# Altium PCB PCB.PcbDoc
Units mm, origin at the board's own origin, x right, y up, seen from the top; angles counter-clockwise.
Board outline 70 x 40 mm, 2 copper layers (Top Layer, Bottom Layer); 68 components, 61 nets, 203 pads, 52 vias.
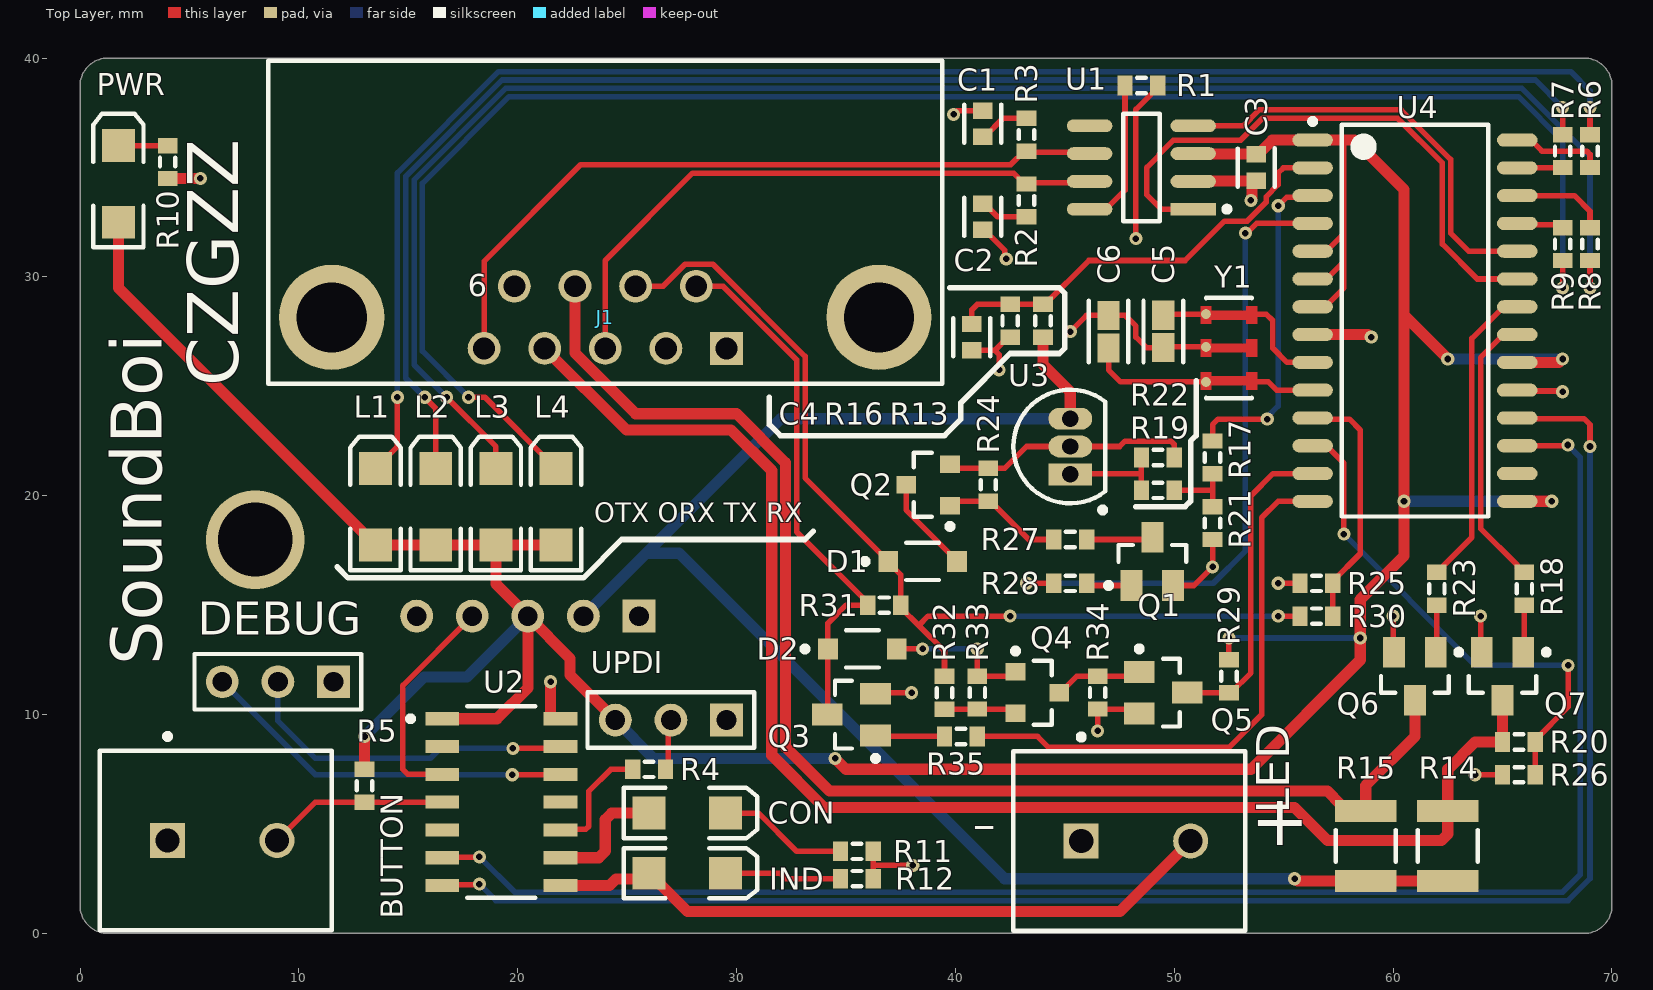
[diagram p0: Top Layer view]
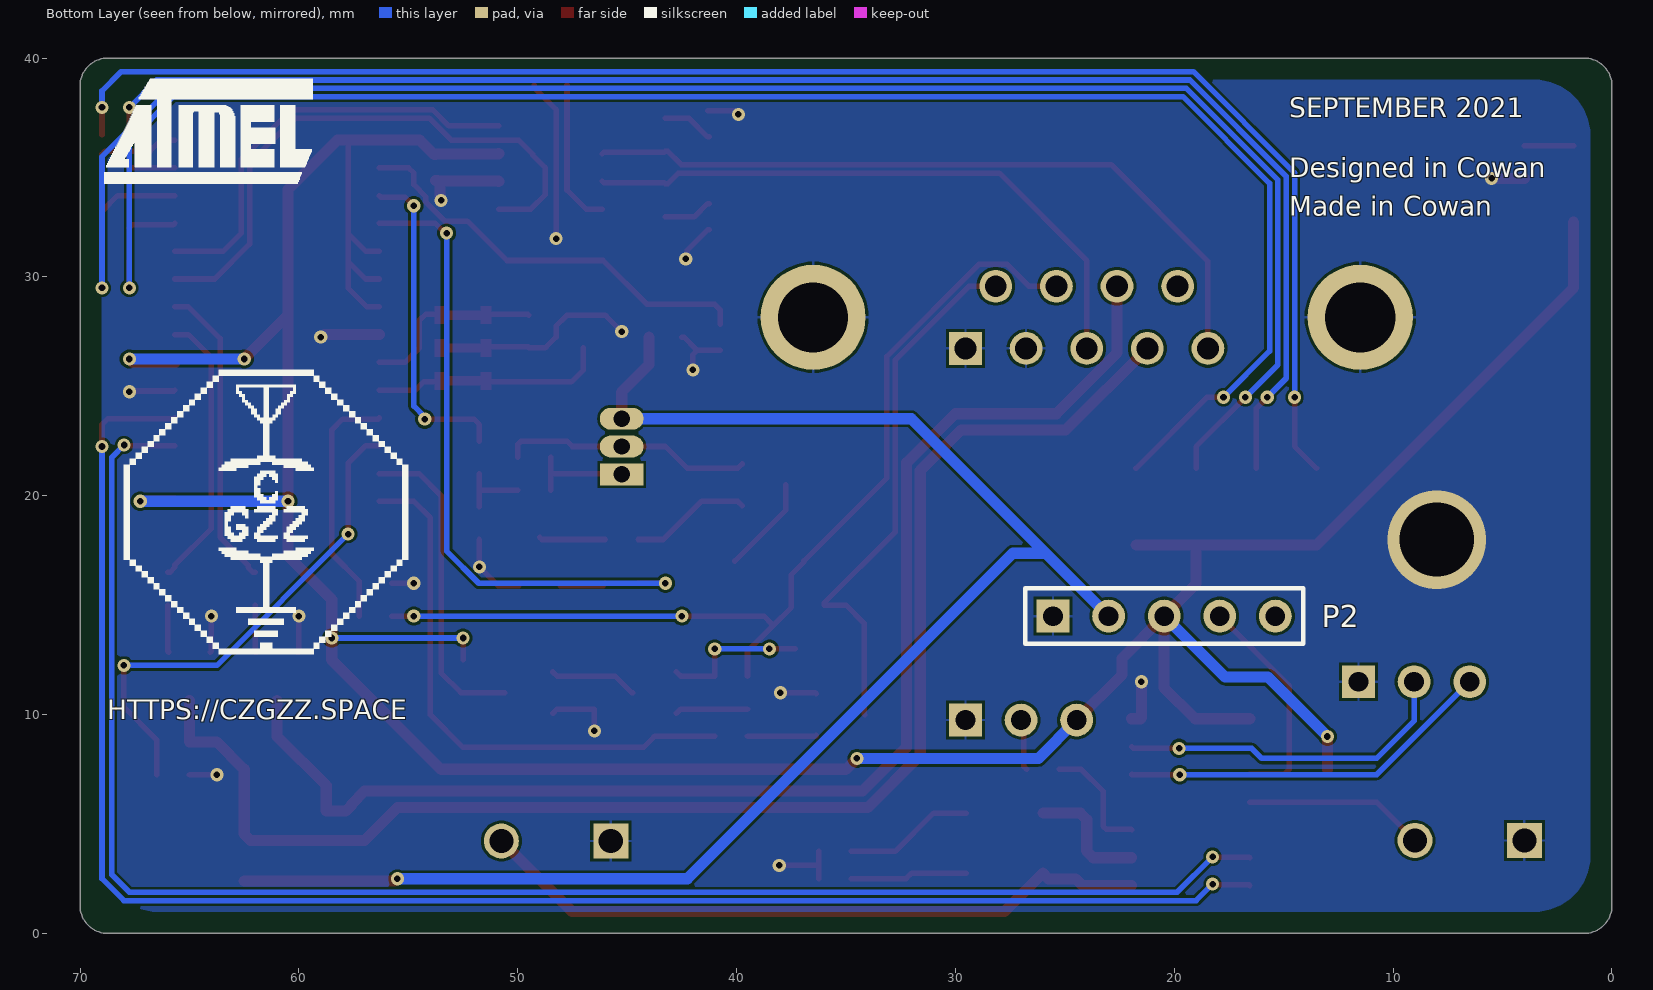
[diagram p1: Bottom Layer view, seen from below]

## Layer stack, top to bottom
Top Solder: solder mask 0.0102, Solder Resist, Dk 3.5
Top Layer: signal copper 0.0356
Dielectric 1: dielectric 0.32, FR-4, Dk 4.8
Bottom Layer: signal copper 0.0356
Bottom Solder: solder mask 0.0102, Solder Resist, Dk 3.5

## Board outline
1.27,0 cw(c1.27,1.27) 0,1.27 0,38.73 cw(c1.27,38.73) 1.27,40 68.73,40 cw(c68.73,38.73) 70,38.73 70,1.27 cw(c68.73,1.27) 68.73,0

## Design rules (kind name [scope] priority, off if disabled: settings)
BoardOutlineClearance [All] p1: gap=0.2 ignorepadtopadclearanceinfootprint=FALSE
Clearance [All] p1: gap=0.127 ignorepadtopadclearanceinfootprint=FALSE except(0.25: Arc-Hole Track-Hole SMDPad-Hole THPad-Hole Via-Hole Fill-Hole Poly-Hole Region-Hole Text-Hole)
ComponentClearance [All] p1: gap=0.127 collisioncheckmode=3 verticalgap=0.127 showdistances=TRUE
DiffPairsRouting [All] p1: maxlimit=0.254 minlimit=0.127 mostfreqgap=0.127 toplayer_minwidth=0.127 toplayer_maxwidth=25.4 toplayer_prefwidth=0.127 bottomlayer_minwidth=0.127 bottomlayer_maxwidth=25.4 bottomlayer_prefwidth=0.127 maxuncoupledlength=12.7
Height [All] p1: minheight=0 maxheight=1816.048 prefheight=12.7
HoleSize [All] p1: absolutevalues=TRUE maxlimit=6.3 minlimit=0.3 maxpercent=80.000 minpercent=20.000
HoleToHoleClearance [All] p1: gap=0.25 allowstackedmicrovias=FALSE
MinimumAnnularRing [All] p1: minimumring=0.076
MinimumSolderMaskSliver [All] p1: minsoldermaskwidth=0
PlaneClearance [All] p1: clearance=0.127
PlaneConnect PlaneConnectPowerPads [InPadClass('PowerPads')] p1: planeconnectstyle=Direct reliefexpansion=0.508 reliefentries=4 reliefconductorwidth=0.254 reliefairgap=0.254
PlaneConnect [All] p2: pad.planeconnectstyle=Relief pad.reliefexpansion=0.3 pad.reliefentries=4 pad.reliefconductorwidth=0.127 pad.reliefairgap=0.127 via.planeconnectstyle=Direct via.reliefexpansion=0.3 via.reliefentries=4 via.reliefconductorwidth=0.127 via.reliefairgap=0.127
PolygonConnect PolygonConnectPowerPads [All vs (InPadClass('PowerPads'))] p1: connectstyle=Direct reliefconductorwidth=0.254 reliefentries=4 polygonreliefangle="90 Angle" airgapwidth=0.254
PolygonConnect [All] p2: thpad.connectstyle=Relief thpad.reliefconductorwidth=0.127 thpad.reliefentries=4 thpad.polygonreliefangle="90 Angle" thpad.airgapwidth=0.127 smdpad.connectstyle=Relief smdpad.reliefconductorwidth=0.127 smdpad.reliefentries=4 smdpad.polygonreliefangle="90 Angle" smdpad.airgapwidth=0.127 via.connectstyle=Direct via.reliefconductorwidth=0.127 via.reliefentries=4 via.polygonreliefangle="90 Angle" via.airgapwidth=0.127
RoutingVias [All] p1: holewidth=0.3 width=0.6 viastyle="Through Hole" minholewidth=0.3 minwidth=0.6 maxholewidth=0.6 maxwidth=6.6
SilkToSilkClearance [All] p1: silktosilkclearance=0
SilkToSolderMaskClearance [IsPad] p1: minsilkscreentomaskgap=0.127 clearancetoexposedcopper=TRUE
SolderMaskExpansion [All] p1: expansion=0.075 istentingtop=FALSE
Width [All] p1: maxlimit=25.4 minlimit=0.127 preferedwidth=0.127 minimp=50.000000 maximp=50.000000 favimp=50.000000
20 further rules are at their usual default settings.

## Components (designator, comment, footprint, x,y, rotation, side; value= is the part's Value field where it differs from the comment)
BUTTON "282836-2" TECO-282836-2_V 6.5,4.25 r0 top
C1 "C0603C561K5RACTU" FP-C0603C-CF-MFG 41.25,37 r90 top value="560 pF"
C2 "C0603C561K5RACTU" FP-C0603C-CF-MFG 41.25,32.75 r270 top value="560 pF"
C3 "C0603C104K5RACTU" FP-C0603C-CF-MFG 53.75,35 r270 top value="0.10 μF"
C4 "C0603C104K5RACTU" FP-C0603C-CF-MFG 40.75,27.25 r270 top value="0.10 μF"
C5 "C1608NP01H270J080AA" FP-C1608-080-0_1-IPC_A 49.5,27.509 r270 top
C6 "C1608NP01H270J080AA" FP-C1608-080-0_1-IPC_A 47,27.5 r90 top
CON "LED2" 3.2X1.6X1.1 27.75,5.5 r0 top
D1 "1N4148W-13-F" FP-SOD123-MFG 38.5,17 r0 top value=2pF
D2 "1N4148W-13-F" FP-SOD123-MFG 35.75,13 r0 top value=2pF
DEBUG "Header 3" HDR1X3 11.58,11.5 r180 top
IND "LED2" 3.2X1.6X1.1 27.75,2.75 r0 top
J1 "618009231421" 618009231421 24,32.5 r180 top
L1 "LED2" 3.2X1.6X1.1 13.5,19.5 r90 top
L2 "LED2" 3.2X1.6X1.1 16.25,19.5 r90 top
L3 "LED2" 3.2X1.6X1.1 19,19.5 r90 top
L4 "LED2" 3.2X1.6X1.1 21.75,19.5 r90 top
LED "282836-2" TECO-282836-2_V 48.25,4.225 r0 top
P2 "Header 5" HDR1X5 25.54,14.5 r180 bottom locked
PWR "LED2" 3.2X1.6X1.1 1.75,34.25 r90 top
Q1 "MMBT3904" FAIR-SOT23-3_V 49,17 r90 top
Q2 "MMBT3906LT1G" ONSC-SOT-23-3-318-08_V 38.75,20.5 r180 top
Q3 "MMBT3904" FAIR-SOT23-3_V 35.25,10 r180 top
Q4 "MMBT3906LT1G" ONSC-SOT-23-3-318-08_V 43.75,11.004 r0 top
Q5 "MMBT3904" FAIR-SOT23-3_V 49.5,11.004 r0 top
Q6 "MMBT3904" FAIR-SOT23-3_V 61,11.75 r270 top
Q7 "MMBT3904" FAIR-SOT23-3_V 65,11.75 r270 top
R1 "Res3" J1-0603 48.5,38.75 r0 top value=4.7K
R2 "Res3" J1-0603 43.25,33.5 r90 top value=100
R3 "Res3" J1-0603 43.25,36.5 r270 top value=100
R4 "Res3" J1-0603 26,7.5 r180 top value=4.7K
R5 "Res3" J1-0603 13,6.75 r90 top value=10K
R6 "Res3" J1-0603 69,35.75 r90 top value=470
R7 "Res3" J1-0603 67.75,35.75 r90 top value=470
R8 "Res3" J1-0603 69,31.5 r270 top value=470
R9 "Res3" J1-0603 67.75,31.5 r270 top value=470
R10 "Res3" J1-0603 4,35.25 r90 top value=470
R11 "Res3" J1-0603 35.5,3.75 r180 top value=470
R12 "Res3" J1-0603 35.5,2.5 r180 top value=470
R13 "Res3" J1-0603 44,28 r90 top value=47K
R14 "RMCF1210JT510R" FP-RMCF1210-MFG 62.5,4 r270 top
R15 "RMCF1210JT510R" FP-RMCF1210-MFG 58.75,4 r270 top
R16 "Res3" J1-0603 42.5,28 r90 top value=10K
R17 "Res3" J1-0603 51.75,21.75 r90 top value=2.2K
R18 "Res3" J1-0603 62,15.75 r270 top value=2.2K
R19 "Res3" J1-0603 49.25,20.25 r180 top value=470
R20 "Res3" J1-0603 65.75,8.75 r0 top value=47K
R21 "Res3" J1-0603 51.75,18.75 r270 top value=1.8K
R22 "Res3" J1-0603 49.25,21.75 r0 top value=470
R23 "Res3" J1-0603 66,15.75 r270 top value=2.2K
R24 "Res3" J1-0603 41.5,20.5 r90 top value=10K
R25 "Res3" J1-0603 56.5,16 r180 top value=22K
R26 "Res3" J1-0603 65.75,7.25 r180 top value=33K
R27 "Res3" J1-0603 45.25,18 r180 top value=4.7K
R28 "Res3" J1-0603 45.25,16 r0 top value=4.7K
R29 "Res3" J1-0603 52.5,11.754 r270 top value=4.7K
R30 "Res3" J1-0603 56.5,14.5 r0 top value=10K
R31 "Res3" J1-0603 36.75,15 r180 top value=22K
R32 "Res3" J1-0603 39.5,11 r90 top value=10K
R33 "Res3" J1-0603 41,11.004 r90 top value=47K
R34 "Res3" J1-0603 46.5,11.004 r90 top value=10K
R35 "Res3" J1-0603 40.25,9 r180 top value=4.7K
U1 "MCP2551T-I/SN" FP-C04-057-SN-IPC_B 48.5,35 r180 top
U2 "ATTINY1614-SSFR" FP-C04-065-D3X-MFG 19.25,6 r0 top
U3 "LM317LZ" Z03A 45.25,22.25 r0 top
U4 "ELM327" SOIC28 61,28 r0 top
UPDI "Header 3" HDR1X3 29.54,9.75 r180 top
Y1 "CSTCR4M00G53-R0" FP-CSTCR4M00G53-R0-MFG 52.5,26.75 r270 top

## Footprints (in the part's own frame and the unit in brackets; to place one, negate y for a bottom-side part, rotate by r counter-clockwise, add the part's x,y. Pads: shape width x height; smd on the part's side, far side on the other; paste and mask are expansions set on the pad)
3.2X1.6X1.1 [mm] "SMT LED; 2 Flat Leads"
  rect 1.5x1.5 smd: 1(-1.75,0) 2(1.75,0)
  silkscreen extent -2.9,-1.15 3.2,1.15
618009231421 [mm] "9 pins, right angled, 10.3mm, with hex screw"
  rect 1.5x1.5 hole 1: 1(-5.54,5.765)
  round 1.5 hole 1: 2(-2.77,5.765) 3(0,5.765) 4(2.77,5.765) 5(5.54,5.765) 6(-4.155,2.925) 7(-1.385,2.925) 8(1.385,2.925) 9(4.155,2.925)
  round 4.8 hole 3.2: M1(-12.5,4.345) M2(12.5,4.345)
  silkscreen extent -15.4,-7.37 15.4,7.37, body extent -15.4,-13.38 15.4,7.37, height 12.55
FAIR-SOT23-3_V [mm] "SOT23, 3-Leads, Body 3.12x1.5mm, Pitch 0.95mm"
  rect 1.4x1 smd: 1(-1.1,0.95) 2(-1.1,-0.95) 3(1.1,0)
  silkscreen extent -1.22,-1.55 0.75,2.12, body extent -1.35,-1.56 1.35,1.56, height 1.2
FP-C04-057-SN-IPC_B [mm]
  rect 2.077x0.582 smd paste+0 mask+0: 1(-2.368,1.905)
  rrect100% 2.077x0.582 smd paste+0 mask+0: 2(-2.368,0.635) 3(-2.368,-0.635) 4(-2.368,-1.905) 5(2.368,-1.905) 6(2.368,-0.635) 7(2.368,0.635) 8(2.368,1.905)
  silkscreen extent -4.03,-2.45 0.83,2.45, body extent -3.66,-2.7 3.66,2.7, height 0.25
FP-C04-065-D3X-MFG [mm]
  rect 1.55x0.6 smd paste+0 mask+0: 1(-2.7,3.81) 2(-2.7,2.54) 3(-2.7,1.27) 4(-2.7,0) 5(-2.7,-1.27) 6(-2.7,-2.54) 7(-2.7,-3.81) 8(2.7,-3.81) 9(2.7,-2.54) 10(2.7,-1.27) 11(2.7,0) 12(2.7,1.27) 13(2.7,2.54) 14(2.7,3.81)
  silkscreen extent -4.27,-4.38 1.55,4.38, body extent -3.57,-4.62 3.57,4.62, height 0.25
FP-C0603C-CF-MFG [mm]
  rect 0.75x0.9 smd paste+0 mask+0: 1(-0.6,0) 2(0.6,0)
  silkscreen extent -0.87,-0.85 0.88,0.85, body extent -1.2,-0.6 1.2,0.6, height 0.25
FP-C1608-080-0_1-IPC_A [mm]
  rect 1.331x1.012 smd paste+0 mask+0: 1(-0.741,0) 2(0.741,0)
  silkscreen extent -1.41,-0.91 1.41,0.91, body extent -1.91,-1.01 1.91,1.01, height 0.25
FP-CSTCR4M00G53-R0-MFG [mm]
  round 0.45 smd paste+0 mask+0: 1(-1.55,-1.05) 2(-0.05,-1.05) 3(1.55,-1.05)
  Top Layer region: -1.9,1.3 -1.1,1.3 -1.1,0.8 -1.3,0.8 -1.3,-0.8 -1.1,-0.8 -1.1,-1.3 -1.9,-1.3 -1.9,-0.8 -1.7,-0.8 -1.7,0.8 -1.9,0.8 -1.9,1.3
  Top Layer region: -0.4,1.3 0.4,1.3 0.4,0.8 0.2,0.8 0.2,-0.8 0.4,-0.8 0.4,-1.3 -0.4,-1.3 -0.4,-0.8 -0.2,-0.8 -0.2,0.8 -0.4,0.8 -0.4,1.3
  Top Layer region: 1.1,1.3 1.9,1.3 1.9,0.8 1.7,0.8 1.7,-0.8 1.9,-0.8 1.9,-1.3 1.1,-1.3 1.1,-0.8 1.3,-0.8 1.3,0.8 1.1,0.8 1.1,1.3
  silkscreen extent -2.3,-1.05 2.3,1.05, body extent -2.4,-1.4 2.4,1.4, height 0.25
FP-RMCF1210-MFG [mm]
  rect 1x2.8 smd paste+0 mask+0: 1(-1.6,0) 2(1.6,0)
  silkscreen extent -0.72,-1.38 0.72,1.38, body extent -2.2,-1.5 2.2,1.5, height 0.25
FP-SOD123-MFG [mm]
  rect 0.9x0.95 smd paste+0 mask+0: 1(-1.575,0) 2(1.575,0)
  silkscreen extent -2.75,-0.85 0.75,0.85, body extent -2.12,-0.95 2.12,0.95, height 0.25
HDR1X3 [mm] "Connector; Header; 3 Position"
  rect 1.5x1.5 hole 0.9: 1(0,0)
  round 1.5 hole 0.9: 2(2.54,0) 3(5.08,0)
  silkscreen extent -1.27,-1.27 6.35,1.27
HDR1X5 [mm] "Connector; Header; 5 Position"
  rect 1.5x1.5 hole 0.9: 1(0,0)
  round 1.5 hole 0.9: 2(2.54,0) 3(5.08,0) 4(7.62,0) 5(10.16,0)
  silkscreen extent -1.27,-1.27 11.43,1.27
J1-0603 [mm] "Chip Resistor, Body 1.6x0.8mm, IPC High Density"
  rect 0.7x0.9 smd: 1(-0.75,0) 2(0.75,0)
  silkscreen extent -0.2,-0.35 0.2,0.35, body extent -0.85,-0.48 0.85,0.48, height 0.9
ONSC-SOT-23-3-318-08_V [mm] "SOT23, 3-Leads, Body 2.92x1.3mm, Pitch 0.95mm"
  rect 0.9x0.8 smd: 1(-1,0.95) 2(-1,-0.95) 3(1,0)
  silkscreen extent -1.13,-1.46 0.65,2.02, body extent -0.65,-1.46 0.65,1.46, height 1.11
SOIC28 [mm]
  oval 1.85x0.6 smd: 1(-4.675,8.255) 2(-4.675,6.985) 3(-4.675,5.715) 4(-4.675,4.445) 5(-4.675,3.175) 6(-4.675,1.905) 7(-4.675,0.635) 8(-4.675,-0.635) 9(-4.675,-1.905) 10(-4.675,-3.175) 11(-4.675,-4.445) 12(-4.675,-5.715) 13(-4.675,-6.985) 14(-4.675,-8.255) 15(4.675,-8.255) 16(4.675,-6.985) 17(4.675,-5.715) 18(4.675,-4.445) 19(4.675,-3.175) 20(4.675,-1.905) 21(4.675,-0.635) 22(4.675,0.635) 23(4.675,1.905) 24(4.675,3.175) 25(4.675,4.445) 26(4.675,5.715) 27(4.675,6.985) 28(4.675,8.255)
  silkscreen extent -4.8,-8.95 3.35,9.23, body extent -5.15,-8.95 5.15,8.95, height 2.65
TECO-282836-2_V [mm] "Female Header, Pitch 5mm, 1 x 2 Position, Height 10mm"
  rect 1.6x1.6 hole 1.1: 1(-2.5,0)
  round 1.6 hole 1.1: 2(2.5,0)
  silkscreen extent -5.6,-4.1 5,4.87, body extent -5.6,-4.1 5,4.1, height 10
Z03A [mm] "TO, Flat Index; 3 In-Line, Axial Leads; Body Dia. 5mm; Leads 0.55 x 0.50 mm (max)"
  rect 2x1 hole 0.75: 1(0,-1.27)
  oval 2x1 hole 0.75: 2(0,0) 3(0,1.27)
  silkscreen extent -2.6,-3.02 1.61,2.6, body extent -2.6,-2.61 1.6,2.61, height 5.2

## Part data
BUTTON LED: library part CMP-1684-00017-1, "Female Header, Pitch 5 mm, 1 x 2 Position, Height 10 mm, Tail Length 3.5 mm, Rohs, Bulk", Color=Green, Current=13.5A, Manufacturer="TE Connectivity", Package Description="Female Header, Pitch 5 mm, 1 x 2 Position, Height 10 mm, Tail Length 3.5 mm", Package Reference=THD, Standard Package=300, Voltage=300V, 3D Model=282836-2.pdf, Category=Connectors,Interconnects, Clamp Material - Plating=Brass-NickelPlated, Contact Material - Plating=Brass-TinPlated, Datasheet URL=http://www.te.com.cn/commerce/DocumentDelivery/DDEController?Action=showdoc&DocId=Catalog+Section%7F1308389_EUROSTYLE_TERMINAL_BLOCKS%7F0607%7Fpdf%7FEnglish%7FENG_CS_1308389_EUROSTYLE_TERMINAL_BLOCKS_0607.pdf%7F282836-2, Dynamic Catalog=BuchananSeries, Family=TerminalBlocks-WiretoBoard, Featured Product=EurostyleTerminalBlockConnectors, Features=Interlocking(Side), Housing Material=Polyamide(PA66),Nylon6/6, Manufacturer URL=http://www.te.com, Mating Orientation=HorizontalwithBoard, Mounting Type=ThroughHole, Number of Levels=1, Other Names="5ULV-02B / A98076", Packaging=Bulk, Pitch="0.197\"(5.00mm)", Positions Per Level=2, Product Training Modules=Wire-to-BoardEurostyleTerminalBlocks, RoHS Information=282836-2StatementofCompliance, Screw Material - Plating=Brass-NickelPlated, Screw Thread=M3, Series=Buchanan, Torque - Screw=0.68Nm(6Lb-In), Wire Gauge=16-30AWG, Wire Termination=Screw-RisingCageClamp
C1 C2: library part CMP-2006-03245-2, "CAP CER 560PF 50V X7R 0603", Capacitance="560 pF", Manufacturer=KEMET, Package=C0603C-CF, Temperature="-55°C to +125°C", Temperature Characteristic=X7R, Temperature Coefficient=30ppm/°C, Temperature Range High=+125°C, Temperature Range Low=-55°C, Tolerance=0.1, Voltage Rating="50 V", Automotive=Yes, Automotive Grade="Grade 1", Category=Cap, ComponentLink2Description=Datasheet, ComponentLink2URL=https://api.kemet.com/component-edge/download/datasheet/C0603C100J5GACAUTO.pdf, Device Class L1="Passive Components", Device Class L2=Capacitors, Device Class L3="Ceramic Capacitors", Digikey Description="CAP CER 560PF 50V X7R 0603", Height=0.87mm, Lead Free=Yes, Manufacturer Part Number=C0603C561K5RACTU, Material=Ceramic, Mouser Description="C0603C 560pF Ceramic Multilayer Capacitor, 50 VDC, +125degC, X7R Dielec, +/-10%", Octopart=https://octopart.com/c0603c561k5ractu-kemet-138569, RoHS=TRUE
C3 C4: library part CMP-2006-03061-2, "CAP CER 0.1UF 50V X7R 0603", Capacitance="0.10 μF", Manufacturer=KEMET, Package=C0603C-CF, Temperature="-55°C to +125°C", Temperature Characteristic=X7R, Temperature Coefficient=30ppm/°C, Temperature Range High=+125°C, Temperature Range Low=-55°C, Tolerance=0.1, Voltage Rating="50 V", Automotive=Yes, Automotive Grade="Grade 1", Category=Cap, ComponentLink2Description=Datasheet, ComponentLink2URL=https://api.kemet.com/component-edge/download/datasheet/C0603C100J5GACAUTO.pdf, Device Class L1="Passive Components", Device Class L2=Capacitors, Device Class L3="Ceramic Capacitors", Digikey Description="CAP CER 0.1UF 50V X7R 0603", Height=0.87mm, Lead Free=Yes, Manufacturer Part Number=C0603C104K5RACTU, Material=Ceramic, Octopart=https://octopart.com/c0603c104k5ractu-kemet-139244, RoHS=TRUE
C5 C6: library part CMP-08246-003773-1, "Multilayer Ceramic Capacitors 27pF ±5% 50V NP0 SMD 0603", Capacitance=27pF, Case Code (Imperial)=0603, Case Code (Metric)=1608, Dielectric=C0G, Max Operating Temperature=150°C, Min Operating Temperature=-55°C, Package Quantity=4000, Tolerance=5%, Voltage Rating=50V, Case/Package=0603, Features="High Temperature", Height=0.8mm, Length=0.063inch, Mount="Surface Mount", Packaging="Tape and Reel", RoHS Compliant=Yes, Series=C, Termination=SMD/SMT, Thickness=0.035inch, Voltage Rating (DC)=50V, Weight=7.1E-05oz, Width=0.8mm
CON IND L1 L2 L3 L4 PWR: "Typical RED, GREEN, YELLOW, AMBER GaAs LED", LatestRevisionDate=17-Jul-2002, LatestRevisionNote="Re-released for DXP Platform.", PackageDescription="SM LED; 2 Flat Leads", PackageReference=3.2X1.6X1.1, PackageVersion=Feb-2002, Published=8-Jun-2000, Publisher="Altium Limited"
D1 D2: library part CMP-12791-000005-1, "DIODE GEN PURP 100V 150MA SOD123", Capacitance=2pF, Forward Current=300mA, Manufacturer="Diodes Inc.", Max Junction Temp=+150°C, Max Repetitive Reverse Voltage=100V, Max Surge Forward Current=1A, Package=SOD123, Peak Reverse Current=1uA, Temperature="-65°C to +150°C", Temperature Range Low=-65°C, Automotive=No, Category=Diode, ComponentLink2Description=Datasheet, ComponentLink2URL=https://upverter.com/datasheet/628e7d6fee5901eee6eef4567d1c3569f2cd3cde.pdf, Device Class L1="Discrete Semiconductors", Device Class L2=Diodes, Device Class L3="Rectifier Diodes", Digikey Description="DIODE GEN PURP 100V 150MA SOD123", Footprint Url=https://www.diodes.com/assets/Package-Files/SOD123.pdf, Height=1.45mm, Lead Free=Yes, Manufacturer Part Number=1N4148W-13-F, Mouser Description="1N4148W Series 2 A 100 V 400 mW Surface Mount Fast Switching Diode - SOD-123", Octopart=https://octopart.com/1n4148w-13-f-diodes+inc.-2359612, Reverse Voltage=100V, RoHS=TRUE, Standoff Height=0mm, Temperature Range High=+150°C
DEBUG UPDI: "Header, 3-Pin", LatestRevisionDate=17-Jul-2002, LatestRevisionNote="Re-released for DXP Platform.", Publisher="Altium Limited"
J1: library part CMP-1502-00288-1, "Male PCB Connector with Hex Screw WR-DSUB, 10.30 mm, Angled, 9 pins", Contact Resistance=30mOhm, Manufacturer="Wurth Elektronik", Operating Temperature=-40to85degC, Rated Current=3A, Working Voltage=125VAC, Datasheet URL=https://katalog.we-online.de/em/datasheet/6180xx231421.pdf, Gender=Male, Manufacturer URL=http://www.we-online.de, Mounting Technology=THT, Orientation=Angled, Package Reference=618009231421, Packaging=Tray, Part Number=618009231421, Pin Number=9, Publisher=WurthElektronik
P2: "Header, 5-Pin", LatestRevisionDate=17-Jul-2002, LatestRevisionNote="Re-released for DXP Platform.", Publisher="Altium Limited"
Q1 Q3 Q5 Q6 Q7: library part CMP-1670-00008-1, "NPN General Purpose Amplifier, 40 V, 0.2 A, -55 to 150 degC, 3-Pin SOT23, RoHS, Tape and Reel", Capacitance="1.8E-11 f", Frequency="12.288 MHz", Frequency Tolerance=30ppm, Load Capacitance="18 pF", Max Operating Temperature=70degC, Min Operating Temperature=-20degC, Package Quantity=1000, ComponentLink1Description="Manufacturer URL", ComponentLink1URL=https://www.fairchildsemi.com/, ComponentLink2Description=Datasheet, ComponentLink2URL=https://www.fairchildsemi.com/datasheets/MM/MMBT3904.pdf, ComponentLink3Description="Package Specification", ComponentLink3URL=http://www.fairchildsemi.com/dwg/MA/MA03D.pdf, DatasheetVersion="Rev. 1.1.0, 10/2014", ESR="40 Ohm", Height="0.041 inch", Length="0.197 inch", Mount="Surface Mount", PackageDescription="3-Pin Small Outline Transistor, Body 2.92 x 1.325 mm, Pitch 0.95 mm", PackageReference=SOT23-3, Packaging="Tape and Reel", Pins=4, REACH SVHC="No SVHC", RoHSCompliant=True, Tolerance=30ppm, Width="0.126 inch"
Q2 Q4: library part CMP-1048-00670-1, "General Purpose Transistor, PNP Silicon, 3-Pin SOT-23, Pb-Free, Tape and Reel", Manufacturer="On Semiconductor", ComponentLink1Description="Manufacturer URL", ComponentLink1URL=http://www.onsemi.com/, ComponentLink2Description=Datasheet, ComponentLink2URL=http://www.onsemi.cn/pub_link/Collateral/MMBT3906LT1-D.PDF, ComponentLink3Description="Package Specification", ComponentLink3URL=http://www.onsemi.cn/pub_link/Collateral/318-08.PDF, DatasheetVersion="Rev. 11", fT Min (MHz)=250, IC Continuous (A)=-0.2, Mounting Technology="Surface Mount", PackageDescription="3-Pin Small Outline Transistor, Body 2.92 x 1.3 mm, Pitch 0.95 mm", PackageReference=SOT-23-3-318-08, PackageVersion="Rev. AP, 11/2009", Packing="Tape and Reel", PartNumber=MMBT3906LT1G, Polarity=PNP, RoHS=TRUE
R1 R2 R3 R4 R5 R6 R7 R8 R9 R10 R11 R12 R13 R16 R17 R18 R19 R20 R21 R22 R23 R24 R25 R26 R27 R28 R29 R30 R31 R32 R33 R34 R35: "Resistor", LatestRevisionDate=29-May-2009, LatestRevisionNote="IPC-7351 Footprint Added.", PackageDescription="Chip Resistor", PackageReference=J1-0603, Published=8-Jun-2000, Publisher="Altium Limited"
R14 R15: library part CMP-26527-002135-1, "510Ω ±5% 0.5W 1210 Thick Film Chip Resistor AEC-Q200 compliant", Case Code (Imperial)=1210, Case Code (Metric)=3225, Max Operating Temperature=155°C, Max Power Dissipation=500mW, Min Operating Temperature=-55°C, Package Quantity=4000, Resistance=510R, Resistor Type="Thick Film", Temperature Coefficient=200ppm/°C, Tolerance=5%, Case/Package=1210, Contact Plating=Tin, Features="Automotive AEC-Q200", Height=0.028inch, Lead Free="Lead Free", Length=0.126inch, Mount="Surface Mount", Number of Terminations=2, Packaging="Tape and Reel", Radiation Hardening=No, RoHS Compliant=Yes, Series=RMCF, Width=0.098inch
U1: library part CMP-0186-00037-3, "IC TRANSCEIVER HALF 1/1 8SOIC", Case/Package=SOIC, Max Operating Temperature=85°C, Max Supply Current=75mA, Max Supply Voltage=5.5V, Min Operating Temperature=-40°C, Min Supply Voltage=4.5V, Operating Supply Voltage=5V, Package Quantity=3300, Data Rate=1Mbps, Height=1.5mm, Interface=CAN, Lead Free="Lead Free", Length=4.9mm, Logic Function=Transceiver, Mount="Surface Mount", Nominal Supply Current=75mA, Number of Drivers=1, Number of Pins=8, Number of Receive Buffers=1, Number of Receivers=1, Number of Transceivers=1, Number of Transmit Buffers=1, Packaging="Tape and Reel", Radiation Hardening=No, REACH SVHC="No SVHC", Width=3.9mm
U2: library part CMP-06276-000021-1, "IC MCU 8BIT 16KB FLASH 14SOIC", Frequency=16MHz, Manufacturer=Microchip, Max Supply Voltage=5.5V, Min Supply Voltage=1.8V, Nominal Supply Current=2.6-10200uA, Package=C04-065-D3X, Temperature="-40°C to +125°C", Temperature Range High=+125°C, Temperature Range Low=-40°C, Automotive=No, Category=IC, ComponentLink2Description=Datasheet, ComponentLink2URL=http://ww1.microchip.com/downloads/en/DeviceDoc/ATtiny1614-DataSheet-DS40001995B.pdf, Core Architecture=AVR, Data Bus Width=8bits, Device Class L1="Integrated Circuits (ICs)", Device Class L2="Embedded Processors and Controllers", Device Class L3=Microcontrollers, Digikey Description="IC MCU 8BIT 16KB FLASH 14SOIC", Height=1.75mm, Interface=I2C,SPI,UART,USART,2-Wire,LIN,IrDA, Ipc Land Pattern Name=SOIC127P600X175-14, Lead Free=Yes, Manufacturer Part Number=ATTINY1614-SSFR, Memory Size=16KBytes, Memory Type=FLASH, Mouser Description="8-Bit AVR Microcontroller 16Kbyte Flash 2Kbyte SRAM 14-Pin SOIC T/R", Number Of A/D Converters=2, Number Of Adc Channels=14, Number Of Cores=1, Number Of I2C Channels=1, Number Of I/Os=12, Number Of Pwm Channels=1, Number Of Spi Channels=1, Number Of Timers/Counters=5, Number Of Uart Channels=1, Octopart=https://octopart.com/attiny1614-ssfr-microchip-82181131, Ram Size=2KBytes, RoHS=TRUE, Standoff Height=0.1mm
U3: library part CMP-0062-00072-2, "3-Terminal Adjustable Regulator, 3-pin TO-92", Manufacturer="National Semiconductor", PackageTopMarking=NSXYTT*LM317*LZ, PowerWise=N, Code_JEDEC=TO-226-AA, ComponentLink1Description="LM317L Datasheet", ComponentLink1URL=http://www.national.com/ds/LM/LM317L.pdf, ComponentLink2Description="LM317L Web Page", ComponentLink2URL=http://www.national.com/pf/LM/LM317L.html, ComponentLink3Description="Z03A Package Page", ComponentLink3URL=http://www.national.com/packaging/folders/z03a.html, CompType="LDO IC", DatasheetVersion=Apr-2008, PackageDescription="TO-92, Molded, 3 Lead", PackageReference=Z03A, PackageVersion="revG, Sep-2000", PinCount=3, RevisionNote="Component URLs added", RoHS=N
Y1: library part CMP-06057-000010-1, "CERAMIC RES 4.0000MHZ 15PF SMD", Capacitance=15pF, Case/Package=SMD/SMT, Dielectric Material=Ceramic, Frequency=4MHz, Frequency Stability=0.2%, Frequency Tolerance=0.5%, Max Operating Temperature=80°C, Min Operating Temperature=-20°C, Package Quantity=3000, Voltage Rating (DC)=6V, Contact Plating=Gold, Height=0.047inch, Impedance=60R, Lead Free="Lead Free", Length=4.5mm, Load Capacitance=15pF, Mount="Surface Mount", Number of Pins=3, Packaging="Tape and Reel", REACH SVHC="No SVHC", Resistor Type=Ceramic, Self Resonant Frequency=4MHz, Termination=SMD/SMT, Tolerance=0.5%, Width=2mm

## Via types
v1: diameter 0.6, hole 0.3, Top Layer to Bottom Layer, tented both sides, 51 vias
v2: diameter 4.5, hole 3.4, Top Layer to Bottom Layer, 1 vias

## Nets (pads, with @x,y where several pads share a name; then routed paths per layer and width w, separated by ;. In a path a pad name is that pad's centre, name@x,y a point inside that pad or via, vN(x,y) a via of type N, cw(c..) or ccw(c..) an arc to the next point about the centre after c; other vN are vias at no path point)
+5: C3.1 L1.1 L2.1 L3.1 L4.1 P2.3 PWR.1 R5.2 R29.1 U1.3 U2.1 U4.1 U4.5 U4.6 U4.7 U4.15 U4.20 UPDI.3 | length 165
  Top Layer w0.254: R29.1 v1(52.5,13.5) ; U4.7 56.885,28.635 57.75,29.5 57.75,30.705 ; U4.6 56.95,29.905 57.75,30.705 ; U4.5 56.95,31.175 57.75,31.975 ; 57.561,36.189 57.75,36 57.75,31.975 ; 57.75,30.705 57.75,31.975
  Top Layer w0.508: PWR.1 1.75,29.5 L1.1 L2.1 L3.1 ; R5.2 v1(13,9) ; U2.1 19.06,9.81 20.46,11.21 P2.3 ; L4.1 L3.1 ; UPDI.3 22.393,11.817 22.393,12.567 P2.3 ; v1(34.5,8) 35,7.5 53.5,7.5 58.5,12.5 v1(58.5,13.5) 58.5,15.25 60.5,17.25 v1(60.5,19.75) 60.5,28.25 ; U1.3 50.882,35.621 53.729,35.621 C3.1 53.825,35.6 54.48,36.255 U4.1 58.245,36.255 60.5,34 60.5,28.25 ; v1(62.5,26.25) 60.5,28.25 ; U4.15 65.678,19.748 67.248,19.748 v1(67.25,19.75) ; U4.20 67.57,26.095 67.725,26.25 v1(67.75,26.25) ; L3.1 19,15.96 P2.3
  Bottom Layer w0.254: v1(52.5,13.5) v1(58.5,13.5)
  Bottom Layer w0.508: v1(13,9) 15.712,11.712 17.672,11.712 P2.3 ; UPDI.3 26.21,8 v1(34.5,8) ; v1(60.5,19.75) v1(67.25,19.75) ; v1(62.5,26.25) v1(67.75,26.25)
+12: P2.2 R13.1 R14.2 R15.2 U3.3 | length 73.1
  Top Layer w0.508: R13.1 44,26 45.25,24.75 U3.3 ; v1(55.5,2.5) 55.525,2.5 55.625,2.4 R15.2 R14.2
  Bottom Layer w0.508: P2.2 25.875,17.375 ; U3.3 32.02,23.52 25.875,17.375 ; v1(55.5,2.5) 42.25,2.5 27.375,17.375 25.875,17.375
CAN-H: J1.3 R2.2 U1.7 | length 28.1
  Top Layer w0.254: J1.3 24,30.75 27.994,34.744 42.656,34.744 43.15,34.25 R2.2 43.307,34.308 46.075,34.308 U1.7
CAN-L: J1.5 R3.2 U1.6 | length 33.8
  Top Layer w0.254: J1.5 18.46,30.71 22.875,35.125 42.525,35.125 43.15,35.75 R3.2 43.308,35.692 46.075,35.692 U1.6
CON_LED: CON.1 U2.9 | length 5.7
  Top Layer w0.508: U2.9 23.702,3.46 24,3.758 24,5.202 24.298,5.5 CON.1
ELM_ISO-K: R23.1 U4.21 | length 12.8
  Top Layer w0.254: U4.21 65.05,27.365 64,26.315 64,18.5 65.677,16.823 65.677,16.723 65.9,16.5 R23.1
ELM_ISO-L: R18.1 U4.22 | length 14.1
  Top Layer w0.254: R18.1 62.1,16.5 62.323,16.723 62.323,16.823 63.603,18.103 63.603,27.188 65.05,28.635 U4.22
GND: BUTTON.1 C1.2 C2.2 C3.2 C4.2 C5.2 C6.2 DEBUG.1 J1.1 J1.2 J1.M1 J1.M2 LED.1 P2.1 Q1.2 Q3.2 Q5.2 Q6.2 Q7.2 R1.2 R10.1 R11.1 R12.1 R16.1 R21.2 R25.2 R26.2 R34.1 U1.2 U2.14 U4.8 U4.19 UPDI.1 Y1.2 | length 50.1
  Top Layer w0.254: R12.1 36.25,3.125 ; R11.1 36.25,3.125 ; Q3.2 36.4,11 v1(38,11) ; v1(38.048,3.107) 38.029,3.125 36.25,3.125 ; v1(39.918,37.427) 40.091,37.6 C1.2 C1.2@41.325,37.6 ; C4.2 41.8,26.65 ; C2.2 41.325,32.15 42.259,31.216 42.259,30.891 v1(42.325,30.825) ; v1(42,25.75) 42,26.45 41.8,26.65 ; R16.1 42.4,27.25 41.8,26.65 ; v1(45.25,27.5) 45.991,28.241 C6.2 47.759,28.241 48.25,27.75 48.25,27.25 48.731,26.769 C5.2 49.531,26.8 Y1.2 ; v1(46.5,9.254) R34.1 48.2,10.254 Q5.2 ; v1(48.25,31.75) 48.25,37.65 49.25,38.65 R1.2 ; Q1.2 50.9,15.9 v1(51.75,16.75) R21.2 ; v1(54.75,16) R25.2 ; v1(60,14.5) 60,12.9 Q6.2 ; v1(63.75,7.25) R26.2 ; v1(64,14.5) 64,12.9 Q7.2 ; U4.19 65.713,24.787 67.712,24.787 v1(67.75,24.75)
  Top Layer w0.508: R10.1 v1(5.5,34.5) ; v1(21.5,11.5) 21.5,9.856 21.546,9.81 U2.14 ; U1.2 50.882,34.379 C3.2@53.654,34.379 ; v1(53.5,33.5) 53.5,33.525 53.554,33.579 53.554,34.279 C3.2@53.654,34.379 ; C3.2 53.675,34.4 C3.2@53.654,34.379 ; U4.8 58.86,27.365 58.975,27.25 v1(59,27.25)
  other v2: 8,18
IND_LED: IND.1 LED.2 U2.8 | length 31.1
  Top Layer w0.508: U2.8 24.19,2.19 24.488,2.488 25.738,2.488 IND.1 27.75,1 47.525,1 LED.2
INPUT: P2.4 U2.3 | length 10.2
  Top Layer w0.254: U2.3 14.98,7.27 14.75,7.5 14.75,11.33 P2.4
ISO-K: J1.4 Q7.3 R14.1 R20.1 | length 66.2
  Top Layer w0.508: J1.4 24.965,23 29.75,23 31.607,21.143 31.607,8.143 34,5.75 55.5,5.75 57,4.25 62.202,4.25 62.5,4.548 R14.1 62.5,7.5 63.75,8.75 R20.1 Q7.3
ISO-L: J1.8 Q6.3 R15.1 | length 61.5
  Top Layer w0.508: J1.8 22.615,26.521 25.386,23.75 30,23.75 32.242,21.508 32.242,8.508 34.25,6.5 57,6.5 57.604,5.896 57.604,5.846 57.85,5.6 R15.1 58.75,5.846 58.75,6.75 61,9 Q6.3
JB+: D1.1 J1.7 R30.1 R31.1 R32.2 | length 44.8
  Top Layer w0.254: J1.7 26.645,29.575 27.649,30.579 28.921,30.579 33.131,26.369 33.131,20.819 36.925,17.025 D1.1 36.925,16.975 37.5,16.4 R31.1 37.5,14.9 38.325,14.075 ; R32.2 39.5,12.9 38.325,14.075 ; v1(42.5,14.5) 38.75,14.5 38.325,14.075 ; v1(54.75,14.5) R30.1
  Bottom Layer w0.254: v1(42.5,14.5) v1(54.75,14.5)
JB-: D2.1 J1.6 Q3.3 R31.2 | length 24.9
  Top Layer w0.254: J1.6 29.386,29.575 32.75,26.211 32.75,18.35 36,15.1 R31.2 35,15 34.175,14.175 D2.1 34.175,10.025 Q3.3
NetBUTTON_2: BUTTON.2 R5.1 U2.4 | length 8.3
  Top Layer w0.254: BUTTON.2 10.75,6 R5.1 U2.4
NetC1_1: C1.1 R3.1 | length 2.4
  Top Layer w0.254: C1.1 41.325,36.4 42.175,37.25 R3.1
NetC2_1: C2.1 R2.1 | length 2.2
  Top Layer w0.254: C2.1 41.325,33.35 41.925,32.75 R2.1
NetC4_1: C4.1 R13.2 R16.2 U4.2 | length 19.4
  Top Layer w0.254: C4.1 40.75,28.5 41,28.75 R16.2 R13.2 44.1,28.75 46.1,30.75 50.5,30.75 52.304,32.554 53.337,32.554 54.196,33.413 54.196,33.662 54.75,34.216 54.75,34.75 54.985,34.985 U4.2
NetC5_1: C5.1 U4.9 Y1.1 | length 8.5
  Top Layer w0.254: C5.1 49.55,28.3 Y1.1 54.2,28.3 54.5,28 54.5,26.75 55.155,26.095 U4.9
NetC6_1: C6.1 U4.10 Y1.3 | length 10.7
  Top Layer w0.254: C6.1 47,25.75 47.55,25.2 Y1.3 54.3,25.2 54.675,24.825 U4.10
NetCON_2: CON.2 R11.2 | length 6
  Top Layer w0.254: CON.2 31,5.5 32.75,3.75 R11.2
NetD1_2: D1.2 Q2.3 | length 4.5
  Top Layer w0.254: Q2.3 37.75,19.35 40.075,17.025 D1.2
NetD2_2: D2.2 Q4.1 R33.2 | length 6.8
  Top Layer w0.254: D2.2 v1(38.5,13) ; v1(41,13) R33.2 42.55,11.754 Q4.1
  Bottom Layer w0.254: v1(38.5,13) v1(41,13)
NetDEBUG_2: DEBUG.2 U2.13 | length 15.6
  Top Layer w0.254: v1(19.778,8.457) 21.867,8.457 U2.13
  Bottom Layer w0.254: DEBUG.2 9.04,9.71 10.75,8 16,8 16.457,8.457 v1(19.778,8.457)
NetDEBUG_3: DEBUG.3 U2.12 | length 17.2
  Top Layer w0.254: v1(19.75,7.25) 19.76,7.26 21.94,7.26 U2.12
  Bottom Layer w0.254: DEBUG.3 10.75,7.25 v1(19.75,7.25)
NetIND_2: IND.2 R12.2 | length 5.4
  Top Layer w0.254: IND.2 32,2.75 32.25,2.5 R12.2
NetL1_2: L1.2 R6.2 | length 72.7
  Top Layer w0.254: L1.2 14.5,22.25 v1(14.5,24.5) ; R6.2 v1(69,37.75)
  Bottom Layer w0.254: v1(14.5,24.5) 14.5,34.75 19.129,39.379 68.121,39.379 69,38.5 v1(69,37.75)
NetL2_2: L2.2 R7.2 | length 70.4
  Top Layer w0.254: v1(15.75,24.5) 16.25,24 L2.2 ; R7.2 v1(67.75,37.75)
  Bottom Layer w0.254: v1(15.75,24.5) 14.881,25.369 14.881,34.592 19.287,38.998 66.502,38.998 v1(67.75,37.75)
NetL3_2: L3.2 R8.2 | length 78.7
  Top Layer w0.254: v1(16.75,24.5) 19,22.25 L3.2 ; v1(69,29.5) R8.2
  Bottom Layer w0.254: v1(16.75,24.5) 15.262,25.988 15.262,34.434 19.445,38.617 65.883,38.617 69,35.5 v1(69,29.5)
NetL4_2: L4.2 R9.2 | length 78.5
  Top Layer w0.254: v1(17.75,24.5) 18.5,24.5 L4.2 ; v1(67.75,29.5) R9.2
  Bottom Layer w0.254: v1(17.75,24.5) 15.643,26.607 15.643,34.277 19.602,38.236 65.725,38.236 67.75,36.211 v1(67.75,29.5)
NetPWR_2: PWR.2 R10.2 | length 2.2
  Top Layer w0.254: PWR.2 R10.2
NetQ1_1: Q1.1 R28.2 | length 2.1
  Top Layer w0.254: R28.2 46.1,15.9 Q1.1
NetQ1_3: Q1.3 R27.1 | length 3
  Top Layer w0.254: R27.1 48.9,18 Q1.3
NetQ2_1: Q2.1 R24.1 R27.2 | length 5.6
  Top Layer w0.254: Q2.1 39.95,19.75 R24.1 41.6,19.75 43.35,18 R27.2
NetQ2_2: Q2.2 R22.2 R24.2 U3.2 | length 11.5
  Top Layer w0.254: Q2.2 39.95,21.25 R24.2 42.25,21.25 43.25,22.25 U3.2 47.5,22.25 47.75,22.5 49.851,22.5 50,22.351 R22.2
NetQ3_1: Q3.1 R35.2 | length 3.2
  Top Layer w0.254: Q3.1 36.4,9 R35.2
NetQ4_2: Q4.2 R32.1 R33.1 | length 3.3
  Top Layer w0.254: R32.1 39.502,10.252 40.998,10.252 R33.1 42.55,10.254 Q4.2
NetQ4_3: Q4.3 Q5.1 R34.2 | length 4
  Top Layer w0.254: Q4.3 44.8,11.004 45.55,11.754 R34.2 48.2,11.754 Q5.1
NetQ5_3: Q5.3 R29.2 U4.13 | length 14.6
  Top Layer w0.254: Q5.3 R29.2 52.6,11.004 53.5,11.904 53.5,20 54.515,21.015 U4.13
NetQ6_1: Q6.1 R18.2 | length 2.2
  Top Layer w0.254: Q6.1 62,12.9 R18.2
NetQ7_1: Q7.1 R23.2 | length 2.2
  Top Layer w0.254: Q7.1 66,12.9 R23.2
NetR1_1: R1.1 U1.8 | length 6.8
  Top Layer w0.254: U1.8 46.88,33.095 47.75,33.965 R1.1
NetR4_1: R4.1 UPDI.2 | length 2.4
  Top Layer w0.254: R4.1 26.875,7.625 26.875,9.625 UPDI.2
NetR4_2: R4.2 U2.10 | length 5.4
  Top Layer w0.254: U2.10 21.97,4.75 23.101,4.75 23.25,4.899 23.25,6.5 24.25,7.5 R4.2
NetR17_1: R17.1 R19.1 R21.1 | length 3.3
  Top Layer w0.254: R19.1 51.75,20.25 ; R21.1 51.75,20.25 ; R17.1 51.75,20.25
NetR17_2: R17.2 U4.3 | length 15.1
  Top Layer w0.254: R17.2 51.75,23.25 52,23.5 v1(54.25,23.5) ; v1(54.75,33.25) 55.149,33.649 56.259,33.649 U4.3
  Bottom Layer w0.254: v1(54.25,23.5) 54.25,23.594 54.75,24.094 v1(54.75,33.25)
NetR19_2: R19.2 R22.1 U3.1 | length 4.8
  Top Layer w0.254: U3.1 45.27,21 48.5,21 ; R19.2 48.5,21 ; R22.1 48.5,21
NetR20_2: R20.2 R26.1 U4.12 | length 23.3
  Top Layer w0.254: U4.12 56.95,22.285 57.75,21.485 v1(57.75,18.25) ; R26.1 R20.2 66.5,8.85 68,10.35 v1(68,12.25)
  Bottom Layer w0.254: v1(57.75,18.25) 63.75,12.25 v1(68,12.25)
NetR25_1: R25.1 R30.2 U4.11 | length 11.4
  Top Layer w0.254: U4.11 56.38,23.5 58,23.5 58.5,23 58.5,17.35 57.25,16.1 R25.1 R30.2
NetR28_1: R28.1 U4.4 | length 29.7
  Top Layer w0.254: v1(43.25,16) R28.1 ; v1(53.25,32) 53.323,32 53.768,32.445 U4.4
  Bottom Layer w0.254: v1(43.25,16) 51.783,16 53.25,17.467 v1(53.25,32)
NetR35_1: R35.1 U4.14 | length 25.5
  Top Layer w0.254: R35.1 43.75,9 44.25,8.5 52.5,8.5 54,10 54,19 54.745,19.745 U4.14
NetU1_1: U1.1 U4.23 | length 26.7
  Top Layer w0.254: U1.1 49.405,33.095 48.75,33.75 48.75,35 49.322,35.572 49.322,35.608 49.964,36.25 53.039,36.25 54.039,37.25 60.211,37.25 62.25,35.211 62.25,31.5 63.845,29.905 U4.23
NetU1_4: U1.4 U4.24 | length 19.8
  Top Layer w0.254: U1.4 53.155,36.905 53.881,37.631 60.369,37.631 62.631,35.369 62.631,32 63.456,31.175 U4.24
NetU2_6: U2.6 U4.17 | length 75.2
  Top Layer w0.254: U2.6 16.57,3.48 18.23,3.48 v1(18.25,3.5) ; U4.17 67.953,22.285 v1(67.988,22.32)
  Bottom Layer w0.254: v1(18.25,3.5) 19.869,1.881 67.75,1.881 68.554,2.685 68.554,21.753 v1(67.988,22.32)
NetU2_7: U2.7 U4.18 | length 77.4
  Top Layer w0.254: U2.7 16.58,2.22 18.22,2.22 v1(18.25,2.25) ; U4.18 65.703,23.527 68.723,23.527 69,23.25 v1(69,22.25)
  Bottom Layer w0.254: v1(18.25,2.25) 19,1.5 68,1.5 69,2.5 v1(69,22.25)
ORX: R7.1 U4.27 | length 2.1
  Top Layer w0.254: U4.27 65.683,34.993 67.742,34.993 R7.1
OTX: R6.1 U4.28 | length 4.2
  Top Layer w0.254: U4.28 66.3,36.255 66.805,35.75 68.851,35.75 69,35.601 R6.1
OUTPUT: P2.5
RX_L: R9.1 U4.25 | length 2.2
  Top Layer w0.254: U4.25 65.741,32.379 67.621,32.379 R9.1
TX_L: R8.1 U4.26 | length 4.4
  Top Layer w0.254: U4.26 68.285,33.715 69,33 R8.1
VBAT: J1.9
pads on no net: U1.5 U2.2 U2.5 U2.11 U4.16

## Polygon pours and split planes (outlines as drawn)
GND on Bottom Layer "NONET_L01_P-001" (solid, remove dead copper, pour order 2): 1,36.46 cw(c3.54,36.46) 3.54,39 66.46,39 cw(c66.46,36.46) 69,36.46 69,3.54 cw(c66.46,3.54) 66.46,1 3.54,1 cw(c3.54,3.54) 1,3.54

## Silkscreen, mask and mechanical layers (free items; w line width, h text height)
Top Overlay:
  lines w0.254: 31.5,24.5 31.5,23.25 32,22.75 39.5,22.75 40.25,23.5 40.25,24.25 42.5,26.5 44.75,26.5 45,26.75 45,29.25 44.75,29.5 39.75,29.5 ; 33.5,18.375 33.125,18 30.5,18 30.25,18 24.75,18 23,16.25 12.25,16.25 11.75,16.75 ; 48.25,19.5 50.5,19.5 50.75,19.75 50.75,22.5 51,22.75 51,25.25 ; 11.75,16.75 11.75,16.75
  text "CZGZZ" at 8,25 h4 r90
  text "OTX ORX TX RX" at 23.5,18.5 h1.5
  text "SoundBoi" at 4.5,12.25 h4 r90
  text "-" at 40.75,3.25 h4
  text "+" at 53.5,3.25 h4
Bottom Overlay:
  drawing of 46 lines, arcs and shapes, not listed
  text "SEPTEMBER 2021" at 14.75,37 h1.5
  text "Designed in Cowan" at 14.75,34.25 h1.5
  text "Made in Cowan" at 14.75,32.5 h1.5
  text "HTTPS://CZGZZ.SPACE" at 68.75,9.5 h1.5
Mechanical 1:
  lines w0.254: 0,1.27 ccw(c1.27,1.27) 1.27,0 38.73,0 48.73,0 68.73,0 ccw(c68.73,1.27) 70,1.27 70,4 70,37.73 70,38.73 ccw(c68.73,38.73) 68.73,40 48.73,40 38.73,40 1.27,40 ccw(c1.27,38.73) 0,38.73 0,1.27

## Text inside footprints (layer, text, board x,y; h text height)
J1: Top Overlay "9" at 18.6,30.115 h1.02 r180; Top 3D Body "PCB Edge" at 27.8,41.175 h1.02 r180